# Altium PCB stop_sign.PcbDoc (part 1 of 2)
Units mm, origin at the board's own origin, x right, y up, seen from the top; angles counter-clockwise.
Board outline 187.78 x 187.78 mm, 2 copper layers (Top Layer, Bottom Layer); 123 components, 124 nets, 550 pads, 94 vias.
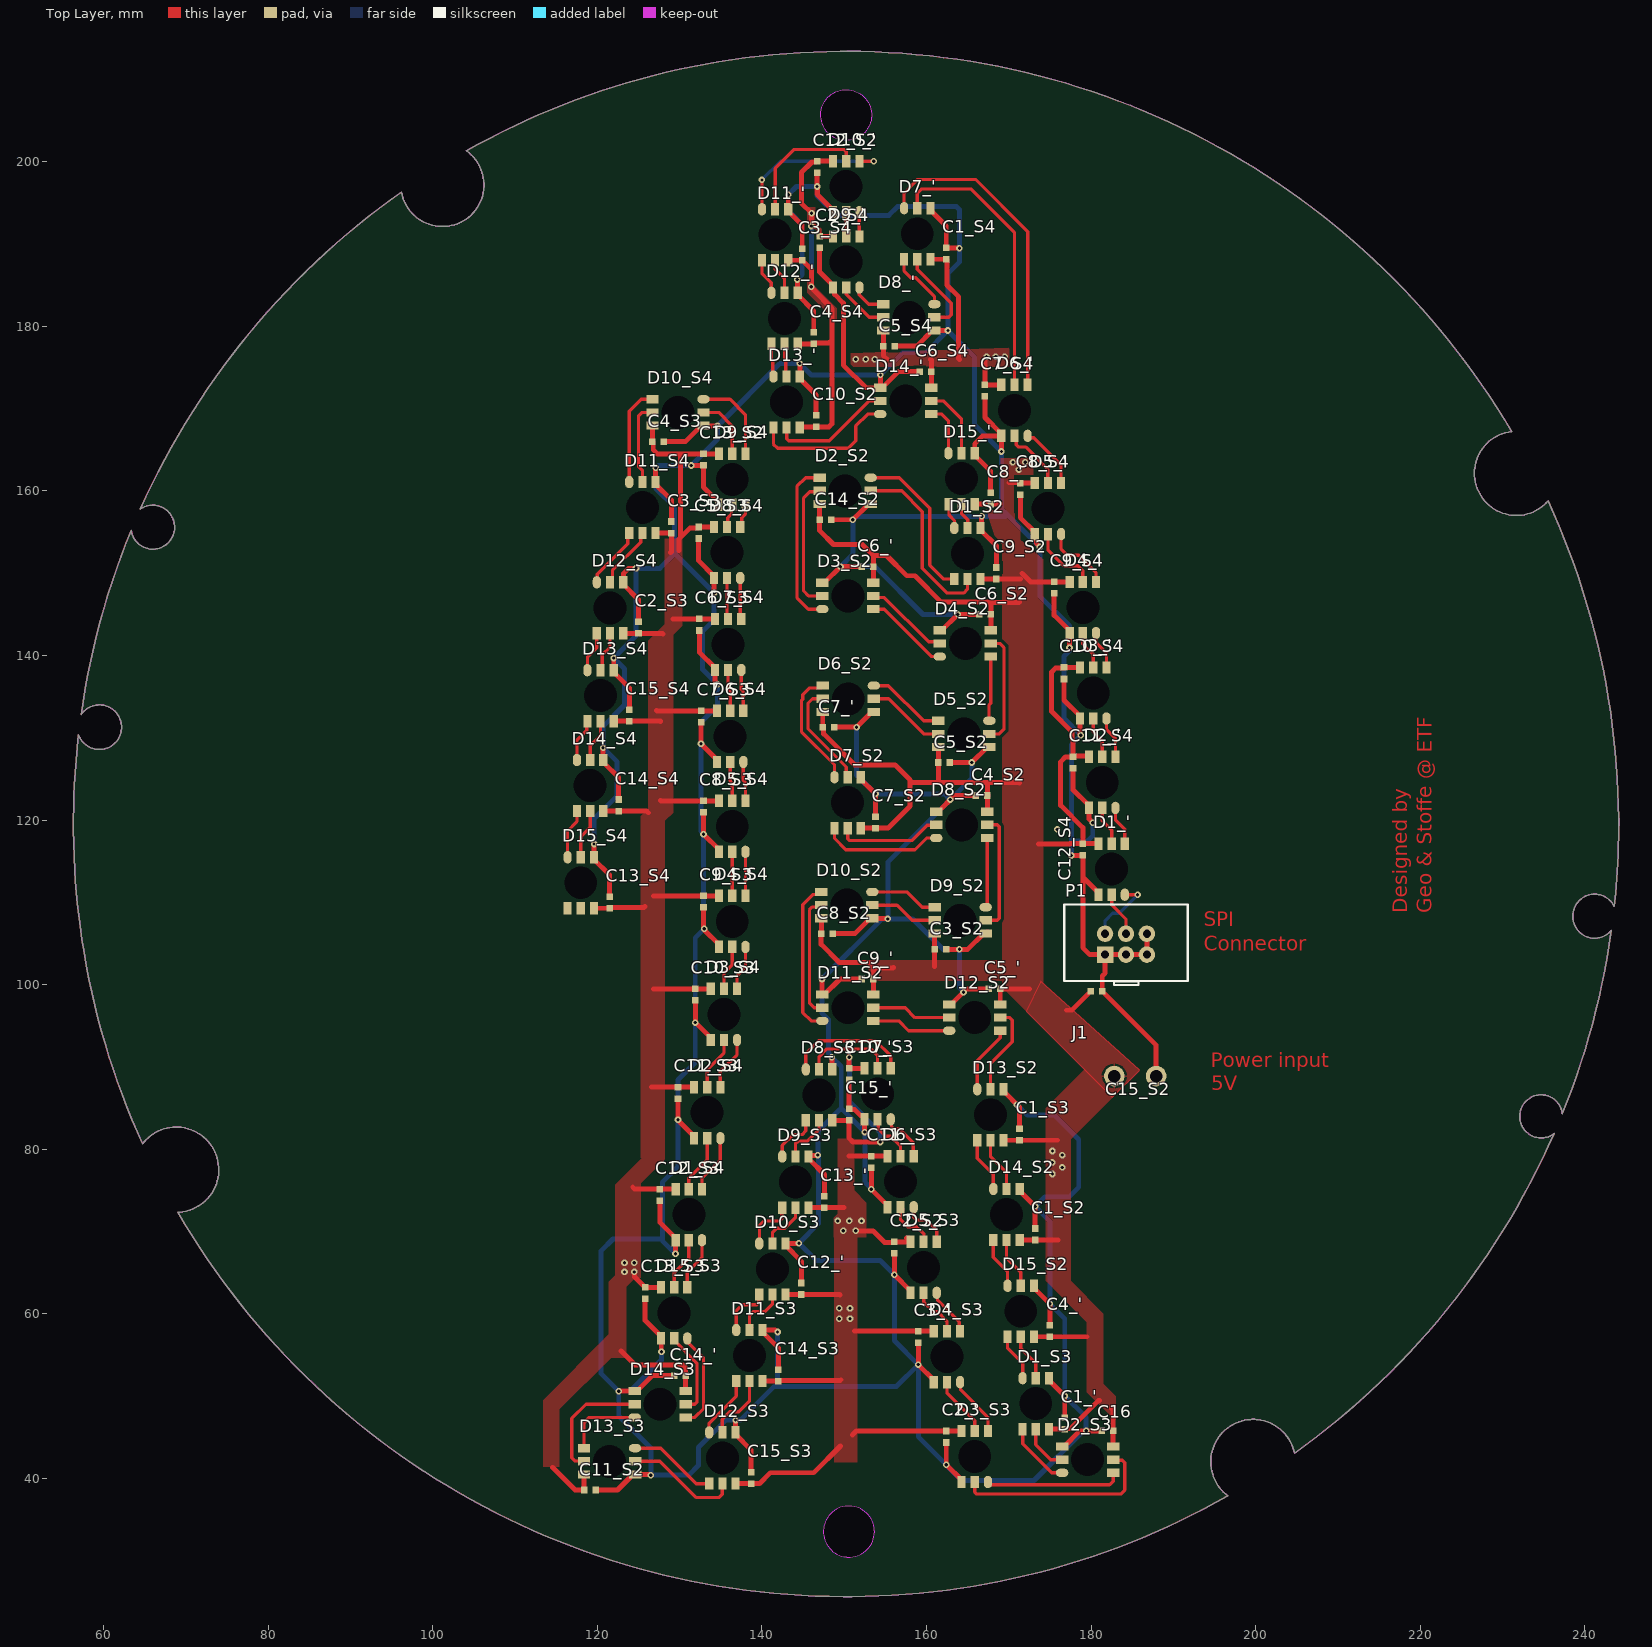
[diagram p0: Top Layer view]
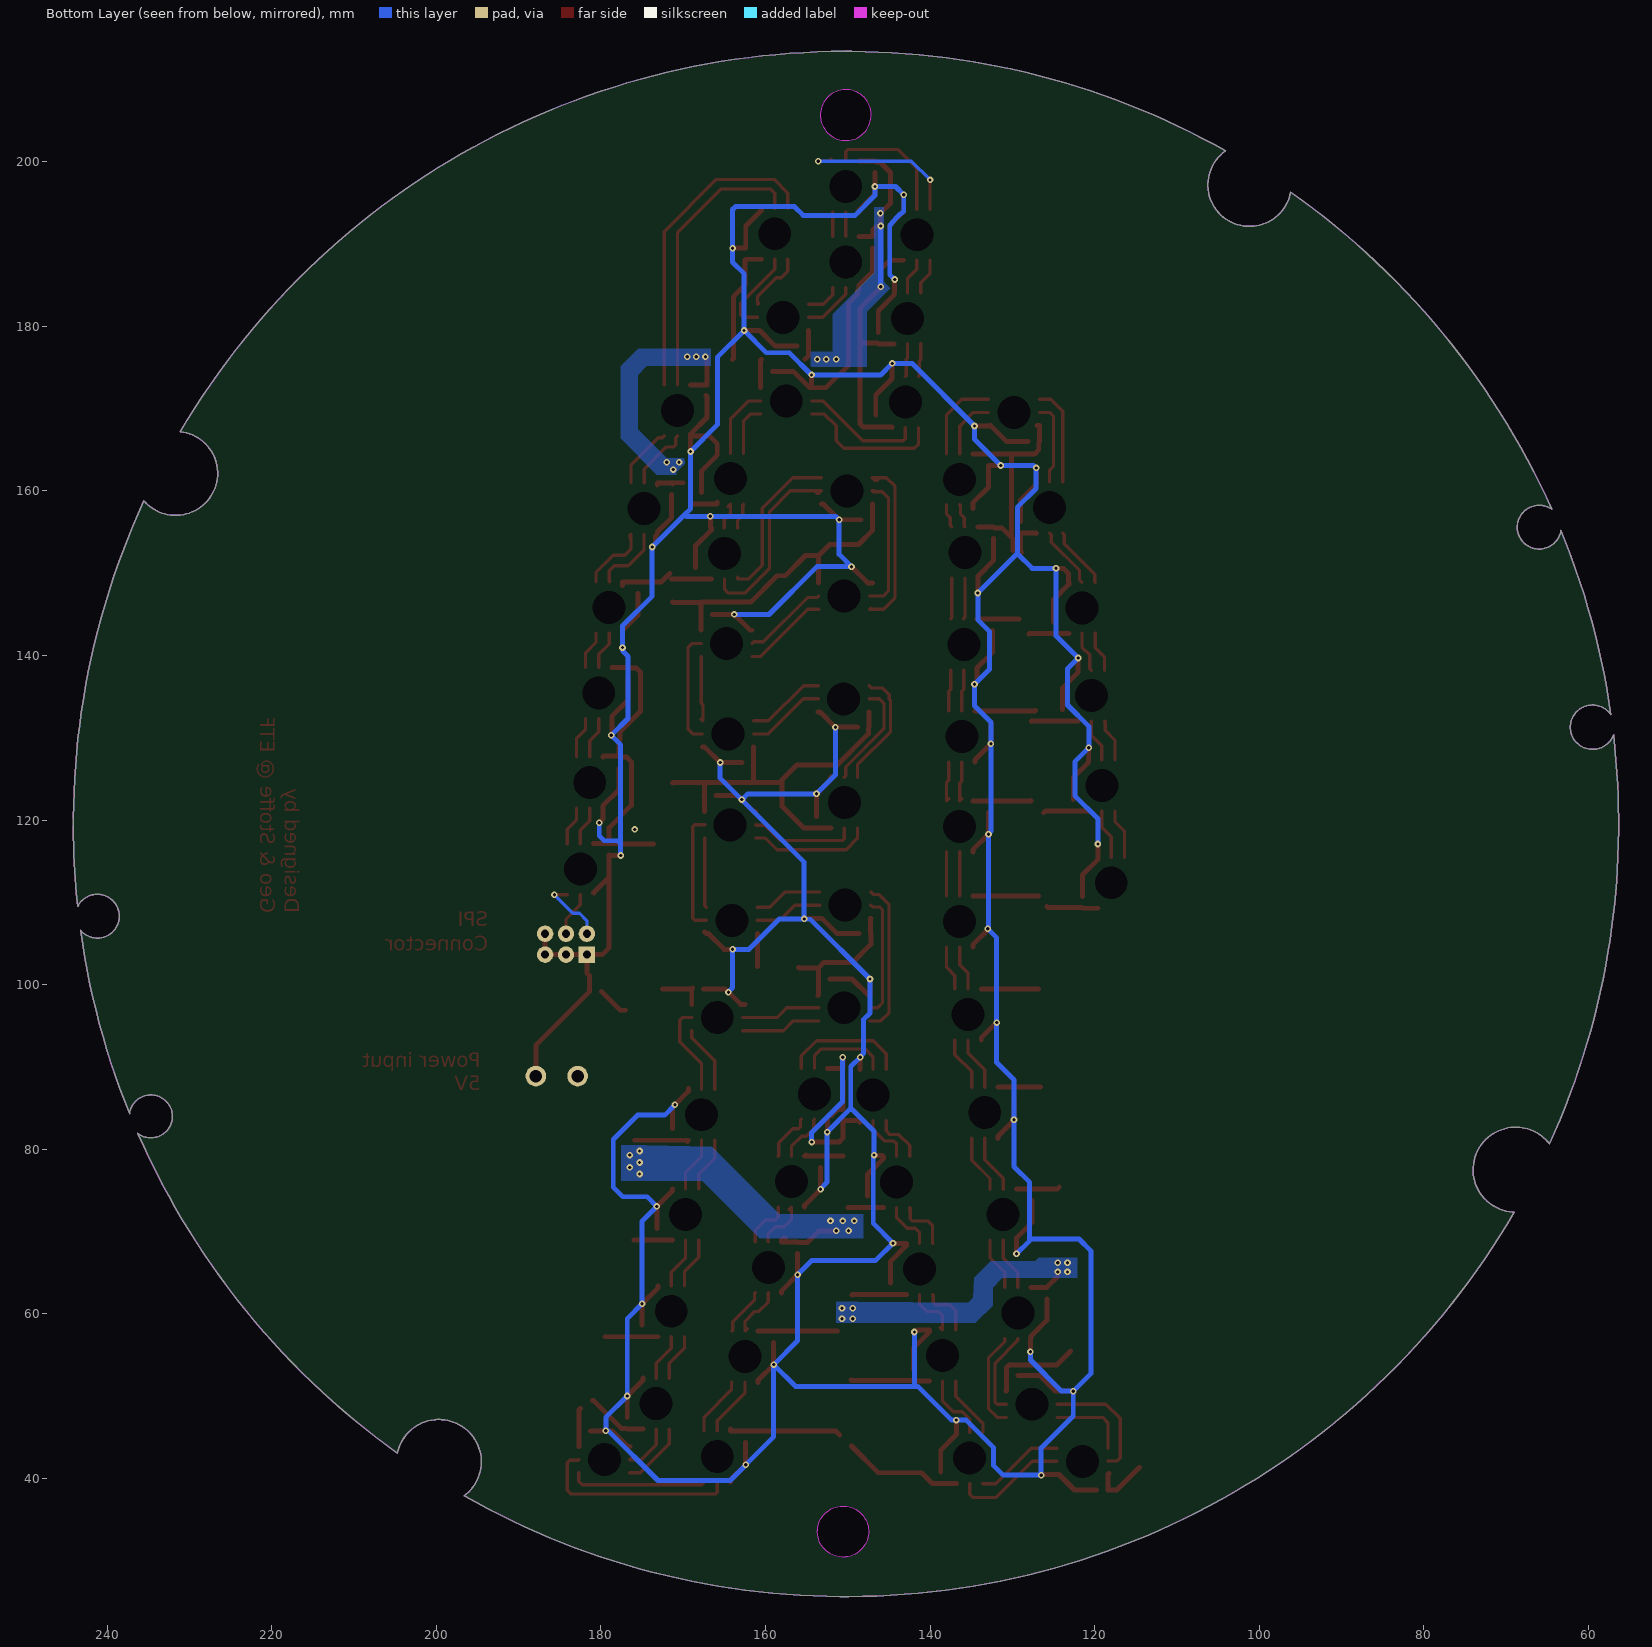
[diagram p1: Bottom Layer view, seen from below]
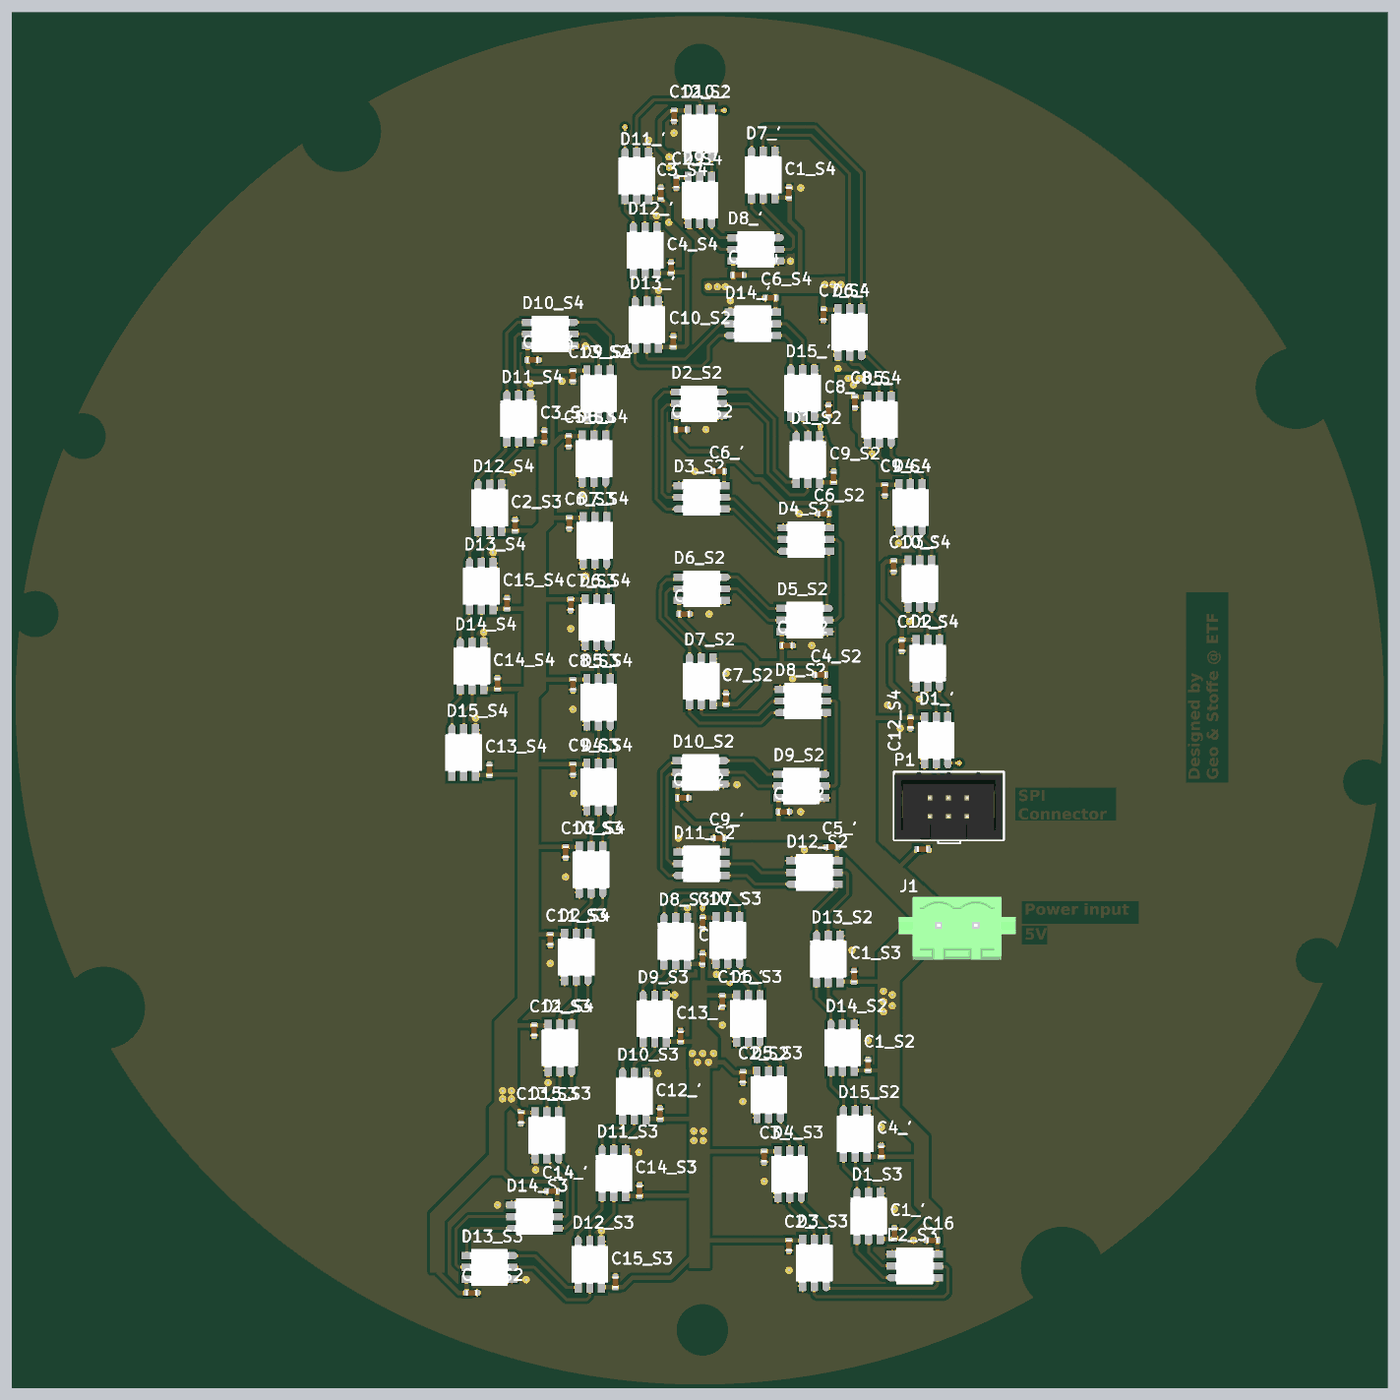
[diagram p3: 3D render of the assembled board from above, using the file's embedded part models]

## Layer stack, top to bottom
Top Solder: solder mask 0.0102, Solder Resist, Dk 3.5
Top Layer: signal copper 0.0356
Dielectric 1: dielectric 0.32, FR-4, Dk 4.8
Bottom Layer: signal copper 0.0356
Bottom Solder: solder mask 0.0102, Solder Resist, Dk 3.5

## Board outline
69.016,72.369 ccw(c68.836,77.602) 69.24,72.382 ccw(c68.841,77.531) 73.127,74.649 ccw(c68.871,77.519) 73.826,76.181 ccw(c68.869,77.517) 73.972,76.953 ccw(c68.811,77.524) 73.999,77.3 ccw(c68.761,77.527) 74.004,77.567 ccw(c68.757,77.527) 73.995,77.831 ccw(c68.836,77.527) 69.43,82.661 ccw(c68.841,77.497) 69.07,82.689 ccw(c68.838,77.448) 68.797,82.694 ccw(c68.837,77.478) 68.668,82.692 ccw(c68.836,77.491) 68.378,82.674 ccw(c68.826,77.579) 66.728,82.244 ccw(c68.841,77.547) 65.999,81.842 ccw(c68.88,77.492) 64.732,80.657 cw(c149.623,119.328) 57.141,107.119 cw(c150.662,119.48) 56.491,113.939 cw(c151.633,119.539) 56.329,118.807 cw(c150.827,119.536) 56.447,124.316 cw(c151.468,119.501) 56.949,130.383 ccw(c59.503,131.304) 58.022,129.029 ccw(c59.485,131.275) 58.851,128.67 ccw(c59.485,131.279) 59.204,128.609 ccw(c59.488,131.308) 59.377,128.597 ccw(c59.489,131.337) 59.511,128.594 ccw(c59.49,131.342) 59.649,128.599 ccw(c59.49,131.297) 62.174,130.987 ccw(c59.474,131.295) 62.189,131.175 ccw(c59.445,131.296) 62.192,131.317 ccw(c59.445,131.296) 62.187,131.455 ccw(c59.489,131.296) 59.8,133.981 ccw(c59.492,131.283) 59.611,133.996 ccw(c59.49,131.256) 59.469,133.998 59.439,133.998 ccw(c59.49,131.264) 59.294,133.992 ccw(c59.484,131.318) 58.198,133.669 ccw(c59.504,131.284) 57.262,132.822 cw(c149.561,119.762) 63.342,155.203 ccw(c65.981,155.6) 64.49,153.386 ccw(c65.971,155.58) 65.327,153.013 ccw(c65.971,155.583) 65.687,152.949 ccw(c65.975,155.614) 65.86,152.936 ccw(c65.976,155.639) 65.997,152.933 ccw(c65.976,155.641) 66.133,152.938 ccw(c65.976,155.6) 68.625,155.294 ccw(c65.963,155.598) 68.64,155.48 ccw(c65.936,155.599) 68.642,155.62 ccw(c65.934,155.599) 68.638,155.756 ccw(c65.976,155.599) 66.282,158.249 ccw(c65.978,155.587) 66.096,158.263 ccw(c65.977,155.559) 65.956,158.266 ccw(c65.976,155.577) 65.845,158.263 ccw(c65.972,155.618) 64.781,157.983 ccw(c65.985,155.592) 64.45,157.785 cw(c150.48,119.27) 96.195,196.327 ccw(c101.183,197.201) 98.319,193.025 ccw(c101.165,197.165) 99.962,192.287 ccw(c101.165,197.171) 100.627,192.17 ccw(c101.171,197.227) 100.959,192.145 ccw(c101.173,197.28) 101.213,192.141 101.238,192.141 ccw(c101.174,197.28) 101.504,192.152 ccw(c101.174,197.201) 106.201,196.619 ccw(c101.148,197.196) 106.229,196.972 ccw(c101.098,197.198) 106.234,197.238 ccw(c101.117,197.199) 106.23,197.4 ccw(c101.148,197.2) 106.209,197.699 ccw(c101.227,197.21) 105.846,199.141 ccw(c101.203,197.199) 105.443,199.91 ccw(c101.143,197.159) 104.093,201.325 cw(c150.014,120.119) 137.99,212.631 cw(c150.163,119.076) 144.668,213.259 cw(c150.221,118.108) 149.489,213.419 150.321,213.421 cw(c150.235,118.191) 155.38,213.282 cw(c150.236,119.549) 231.105,167.219 ccw(c231.682,162.142) 226.606,162.729 ccw(c231.709,162.148) 226.578,162.372 ccw(c231.763,162.145) 226.573,162.105 ccw(c231.763,162.144) 226.581,161.844 ccw(c231.682,162.145) 231.095,157.069 ccw(c231.678,162.173) 231.451,157.041 ccw(c231.68,162.225) 231.72,157.036 231.734,157.036 ccw(c231.681,162.196) 231.988,157.045 ccw(c231.69,162.093) 233.985,157.587 ccw(c231.666,162.14) 234.601,157.957 ccw(c231.632,162.189) 235.527,158.79 cw(c150.832,119.755) 243.35,131.473 cw(c149.647,119.582) 243.945,125.016 cw(c148.684,119.525) 244.101,120.258 244.103,119.313 cw(c150.672,119.544) 244.065,116.857 cw(c149.755,119.57) 243.981,114.75 cw(c148.83,119.616) 243.866,112.868 cw(c147.828,119.687) 243.728,111.144 243.571,109.534 ccw(c241.176,108.318) 242.593,110.6 ccw(c241.197,108.352) 241.842,110.918 ccw(c241.198,108.35) 241.475,110.983 ccw(c241.194,108.325) 241.303,110.996 ccw(c241.193,108.296) 241.172,110.998 ccw(c241.193,108.291) 241.036,110.993 ccw(c241.193,108.329) 238.542,108.635 ccw(c241.207,108.331) 238.527,108.449 ccw(c241.237,108.33) 238.524,108.309 ccw(c241.24,108.33) 238.529,108.173 ccw(c241.193,108.33) 240.887,105.678 ccw(c241.191,108.344) 241.073,105.664 ccw(c241.192,108.375) 241.213,105.661 241.242,105.662 ccw(c241.193,108.355) 241.383,105.668 ccw(c241.198,108.303) 242.349,105.925 ccw(c241.187,108.325) 242.692,106.124 ccw(c241.169,108.351) 243.214,106.591 cw(c150.867,119.307) 237.272,84.324 ccw(c234.679,84.001) 234.974,86.597 ccw(c234.683,83.988) 234.797,86.611 ccw(c234.681,83.959) 234.661,86.613 ccw(c234.681,83.961) 234.528,86.609 ccw(c234.681,84.001) 232.086,84.301 ccw(c234.696,84.003) 232.072,84.119 ccw(c234.725,84.002) 232.069,83.981 ccw(c234.725,84.002) 232.073,83.848 ccw(c234.682,84.002) 234.381,81.406 ccw(c234.679,84.017) 234.564,81.392 ccw(c234.681,84.045) 234.701,81.389 ccw(c234.681,84.018) 234.807,81.392 ccw(c234.684,83.971) 235.591,81.554 ccw(c234.677,83.99) 235.847,81.666 ccw(c234.665,84.014) 236.054,81.782 ccw(c234.651,84.037) 236.265,81.928 cw(c149.955,119.783) 204.727,43.086 ccw(c199.683,42.024) 200.266,47.145 ccw(c199.689,41.997) 199.914,47.173 ccw(c199.687,41.947) 199.646,47.177 ccw(c199.686,41.944) 199.383,47.169 ccw(c199.686,42.025) 194.568,42.617 ccw(c199.714,42.03) 194.539,42.258 ccw(c199.768,42.027) 194.535,41.986 ccw(c199.753,42.027) 194.536,41.881 ccw(c199.722,42.025) 194.552,41.598 ccw(c199.632,42.015) 195.015,39.857 ccw(c199.668,42.033) 195.408,39.162 ccw(c199.723,42.072) 196.613,37.898 cw(c150.414,118.949) 162.469,26.438 cw(c150.267,119.978) 155.795,25.808 cw(c150.208,120.949) 150.94,25.647 149.894,25.644 cw(c150.193,120.842) 144.806,25.796 cw(c150.196,119.523)
cut-out: 147.472,33.367 ccw(c150.575,33.55) 150.218,30.463 ccw(c150.572,33.569) 150.434,30.445 ccw(c150.574,33.599) 150.598,30.443 ccw(c150.574,33.602) 150.757,30.448 ccw(c150.574,33.55) 153.661,33.193 ccw(c150.555,33.548) 153.678,33.41 ccw(c150.524,33.549) 153.681,33.574 ccw(c150.522,33.549) 153.676,33.732 ccw(c150.573,33.549) 150.93,36.637 ccw(c150.576,33.534) 150.714,36.654 ccw(c150.575,33.504) 150.55,36.657 ccw(c150.574,33.5) 150.391,36.652 ccw(c150.574,33.549) 147.487,33.906 ccw(c150.592,33.552) 147.47,33.689 ccw(c150.623,33.55) 147.467,33.526 ccw(c150.626,33.55)
cut-out: 149.886,202.612 cw(c150.241,205.683) 147.154,205.501 cw(c150.292,205.683) 147.149,205.659 cw(c150.287,205.684) 147.152,205.822 cw(c150.259,205.685) 147.169,206.037 cw(c150.241,205.682) 150.059,208.769 cw(c150.24,205.636) 150.216,208.774 cw(c150.241,205.64) 150.379,208.771 cw(c150.242,205.664) 150.595,208.754 cw(c150.24,205.683) 153.326,205.865 cw(c150.189,205.683) 153.331,205.707 cw(c150.197,205.682) 153.329,205.544 cw(c150.224,205.681) 153.311,205.328 cw(c150.24,205.684) 150.422,202.597 cw(c150.24,205.735) 150.264,202.592 cw(c150.24,205.732) 150.101,202.595 cw(c150.238,205.701)

## Design rules (kind name [scope] priority, off if disabled: settings)
Clearance [All] p1: gap=0.4 ignorepadtopadclearanceinfootprint=FALSE except(0.2: THPad-Hole; 0.3: SMDPad-THPad SMDPad-Hole)
HoleSize [All] p1: absolutevalues=TRUE maxlimit=5 minlimit=0.025 maxpercent=80.000 minpercent=20.000
MinimumSolderMaskSliver [All] p1 off: minsoldermaskwidth=0.254
PlaneConnect [All] p1: planeconnectstyle=Relief reliefexpansion=0.508 reliefentries=4 reliefconductorwidth=0.4 reliefairgap=0.4
PolygonConnect PolygonConnect_1 [IsVia] p1: connectstyle=Direct reliefconductorwidth=0.254 reliefentries=4 polygonreliefangle="90 Angle" airgapwidth=0.254
PolygonConnect [All] p2: connectstyle=Relief reliefconductorwidth=0.254 reliefentries=4 polygonreliefangle="90 Angle" airgapwidth=0.254
RoutingVias [All] p1: holewidth=0.4 width=0.8 viastyle="Through Hole" minholewidth=0.4 minwidth=0.8 maxholewidth=0.4 maxwidth=0.8
SilkToSilkClearance [All] p1 off: silktosilkclearance=0.254
SilkToSolderMaskClearance [IsPad] p1 off: minsilkscreentomaskgap=0.254 clearancetoexposedcopper=TRUE
SolderMaskExpansion [All] p1: expansion=0.102 istentingtop=FALSE
Width Width_1 [InNet('5V') OR InNet('GND')] p1: maxlimit=0.6 minlimit=0.6 preferedwidth=0.6
Width [All] p2: maxlimit=0.8 minlimit=0.3 preferedwidth=0.4
25 further rules are at their usual default settings.

## Classes and differential pairs
channel class sk9822_array: ' S2 S3 S4
component class stop_sign: C16 J1 P1
component class S4: C1_S4 C2_S4 C3_S4 C4_S4 C5_S4 C6_S4 C7_S4 C8_S4 C9_S4 C10_S4 C11_S4 C12_S4 C13_S4 C14_S4 C15_S4 D1_S4 D2_S4 D3_S4 D4_S4 D5_S4 D6_S4 D7_S4 D8_S4 D9_S4 D10_S4 D11_S4 D12_S4 D13_S4 D14_S4 D15_S4
component class S3: C1_S3 C2_S3 C3_S3 C4_S3 C5_S3 C6_S3 C7_S3 C8_S3 C9_S3 C10_S3 C11_S3 C12_S3 C13_S3 C14_S3 C15_S3 D1_S3 D2_S3 D3_S3 D4_S3 D5_S3 D6_S3 D7_S3 D8_S3 D9_S3 D10_S3 D11_S3 D12_S3 D13_S3 D14_S3 D15_S3
component class S2: C1_S2 C2_S2 C3_S2 C4_S2 C5_S2 C6_S2 C7_S2 C8_S2 C9_S2 C10_S2 C11_S2 C12_S2 C13_S2 C14_S2 C15_S2 D1_S2 D2_S2 D3_S2 D4_S2 D5_S2 D6_S2 D7_S2 D8_S2 D9_S2 D10_S2 D11_S2 D12_S2 D13_S2 D14_S2 D15_S2
component class ': C1_' C2_' C3_' C4_' C5_' C6_' C7_' C8_' C9_' C10_' C11_' C12_' C13_' C14_' C15_' D1_' D2_' D3_' D4_' D5_' D6_' D7_' D8_' D9_' D10_' D11_' D12_' D13_' D14_' D15_'

## Components (designator, comment, footprint, x,y, rotation, side; value= is the part's Value field where it differs from the comment)
C1_' "0603, capacitor" "0603 cap" 176.8,46.697 r90 top value=100n (schematic designator C1)
C1_S2 "0603, capacitor" "0603 cap" 173.2,69.684 r90 top value=100n (schematic designator C1)
C1_S3 "0603, capacitor" "0603 cap" 171.3,81.801 r90 top value=100n (schematic designator C1)
C1_S4 "0603, capacitor" "0603 cap" 162.4,188.862 r90 top value=100n (schematic designator C1)
C2_' "0603, capacitor" "0603 cap" 162.4,45.072 r270 top value=100n (schematic designator C2)
C2_S2 "0603, capacitor" "0603 cap" 156.1,68.059 r270 top value=100n (schematic designator C2)
C2_S3 "0603, capacitor" "0603 cap" 125,143.396 r90 top value=100n (schematic designator C2)
C2_S4 "0603, capacitor" "0603 cap" 147,190.233 r270 top value=100n (schematic designator C2)
C3_' "0603, capacitor" "0603 cap" 159,57.212 r270 top value=100n (schematic designator C3)
C3_S2 "0603, capacitor" "0603 cap" 161.684,104.3 r0 top value=100n (schematic designator C3)
C3_S3 "0603, capacitor" "0603 cap" 129,155.588 r90 top value=100n (schematic designator C3)
C3_S4 "0603, capacitor" "0603 cap" 144.9,188.735 r90 top value=100n (schematic designator C3)
C4_' "0603, capacitor" "0603 cap" 175,57.925 r90 top value=100n (schematic designator C4)
C4_S2 "0603, capacitor" "0603 cap" 166.686,123 r180 top value=100n (schematic designator C4)
C4_S3 "0603, capacitor" "0603 cap" 127.394,166 r0 top value=100n (schematic designator C4)
C4_S4 "0603, capacitor" "0603 cap" 146.3,178.575 r90 top value=100n (schematic designator C4)
C5_' "0603, capacitor" "0603 cap" 168.262,99.5 r180 top value=100n (schematic designator C5)
C5_S2 "0603, capacitor" "0603 cap" 162.14,127 r0 top value=100n (schematic designator C5)
C5_S3 "0603, capacitor" "0603 cap" 132.3,154.927 r270 top value=100n (schematic designator C5)
C5_S4 "0603, capacitor" "0603 cap" 155.461,177.6 r0 top value=100n (schematic designator C5)
C6_' "0603, capacitor" "0603 cap" 152.843,150.8 r180 top value=100n (schematic designator C6)
C6_S2 "0603, capacitor" "0603 cap" 167.119,145 r180 top value=100n (schematic designator C6)
C6_S3 "0603, capacitor" "0603 cap" 132.4,143.751 r270 top value=100n (schematic designator C6)
C6_S4 "0603, capacitor" "0603 cap" 159.88,174.5 r180 top value=100n (schematic designator C6)
C7_' "0603, capacitor" "0603 cap" 148.095,131.3 r0 top value=100n (schematic designator C7)
C7_S2 "0603, capacitor" "0603 cap" 153.8,119.722 r90 top value=100n (schematic designator C7)
C7_S3 "0603, capacitor" "0603 cap" 132.6,132.575 r270 top value=100n (schematic designator C7)
C7_S4 "0603, capacitor" "0603 cap" 167.1,172.2 r270 top value=100n (schematic designator C7)
C8_' "0603, capacitor" "0603 cap" 167.8,159.092 r90 top value=100n (schematic designator C8)
C8_S2 "0603, capacitor" "0603 cap" 147.916,106.2 r0 top value=100n (schematic designator C8)
C8_S3 "0603, capacitor" "0603 cap" 132.9,121.653 r270 top value=100n (schematic designator C8)
C8_S4 "0603, capacitor" "0603 cap" 171.4,160.261 r270 top value=100n (schematic designator C8)
C9_' "0603, capacitor" "0603 cap" 152.843,100.7 r180 top value=100n (schematic designator C9)
C9_S2 "0603, capacitor" "0603 cap" 168.5,150 r90 top value=100n (schematic designator C9)
C9_S3 "0603, capacitor" "0603 cap" 132.9,110.096 r270 top value=100n (schematic designator C9)
C9_S4 "0603, capacitor" "0603 cap" 175.5,148.248 r270 top value=100n (schematic designator C9)
C10_' "0603, capacitor" "0603 cap" 150.6,89.141 r270 top value=100n (schematic designator C10)
C10_S2 "0603, capacitor" "0603 cap" 146.6,168.5 r90 top value=100n (schematic designator C10)
C10_S3 "0603, capacitor" "0603 cap" 131.9,98.793 r270 top value=100n (schematic designator C10)
C10_S4 "0603, capacitor" "0603 cap" 176.7,137.857 r270 top value=100n (schematic designator C10)
C11_' "0603, capacitor" "0603 cap" 153.3,78.473 r270 top value=100n (schematic designator C11)
C11_S2 "0603, capacitor" "0603 cap" 119.087,38.6 r0 top value=100n (schematic designator C11)
C11_S3 "0603, capacitor" "0603 cap" 129.8,86.855 r270 top value=100n (schematic designator C11)
C11_S4 "0603, capacitor" "0603 cap" 177.8,126.987 r270 top value=100n (schematic designator C11)
C12_' "0603, capacitor" "0603 cap" 144.8,63.057 r90 top value=100n (schematic designator C12)
C12_S2 "0603, capacitor" "0603 cap" 146.7,199.377 r270 top value=100n (schematic designator C12)
C12_S3 "0603, capacitor" "0603 cap" 127.6,74.461 r270 top value=100n (schematic designator C12)
C12_S4 "0603, capacitor" "0603 cap" 179,116.446 r270 top value=100n (schematic designator C12)
C13_' "0603, capacitor" "0603 cap" 147.6,73.621 r90 top value=100n (schematic designator C13)
C13_S2 "0603, capacitor" "0603 cap" 132.9,163.817 r270 top value=100n (schematic designator C13)
C13_S3 "0603, capacitor" "0603 cap" 125.798,62.523 r270 top value=100n (schematic designator C13)
C13_S4 "0603, capacitor" "0603 cap" 121.5,109.995 r90 top value=100n (schematic designator C13)
C14_' "0603, capacitor" "0603 cap" 130.035,52.5 r180 top value=100n (schematic designator C14)
C14_S2 "0603, capacitor" "0603 cap" 147.714,156.5 r0 top value=100n (schematic designator C14)
C14_S3 "0603, capacitor" "0603 cap" 142,52.539 r90 top value=100n (schematic designator C14)
C14_S4 "0603, capacitor" "0603 cap" 122.6,121.806 r90 top value=100n (schematic designator C14)
C15_' "0603, capacitor" "0603 cap" 150.6,84.214 r90 top value=100n (schematic designator C15)
C15_S2 "0603, capacitor" "0603 cap" 180.659,99.2 r0 top value=100n (schematic designator C15)
C15_S3 "0603, capacitor" "0603 cap" 138.7,40.07 r90 top value=100n (schematic designator C15)
C15_S4 "0603, capacitor" "0603 cap" 123.9,132.728 r90 top value=100n (schematic designator C15)
C16 "0603, capacitor" "0603 cap" 181.978,45.8 r180 top value=100n
D1_' "Neo - SK9822" SK9822_FLIPPED 182.499,114.046 r270 top value=WS2812 (schematic designator D1)
D1_S2 "Neo - SK9822" SK9822_FLIPPED 164.973,152.4 r90 top value=WS2812 (schematic designator D1)
D1_S3 "Neo - SK9822" SK9822_FLIPPED 173.279,49.097 r90 top value=WS2812 (schematic designator D1)
D1_S4 "Neo - SK9822" SK9822_FLIPPED 131.115,72.061 r270 top value=WS2812 (schematic designator D1)
D2_' "Neo - SK9822" SK9822_FLIPPED 181.356,124.587 r270 top value=WS2812 (schematic designator D2)
D2_S2 "Neo - SK9822" SK9822_FLIPPED 150.114,160.02 r0 top value=WS2812 (schematic designator D2)
D2_S3 "Neo - SK9822" SK9822_FLIPPED 179.578,42.291 r180 top value=WS2812 (schematic designator D2)
D2_S4 "Neo - SK9822" SK9822_FLIPPED 133.35,84.455 r270 top value=WS2812 (schematic designator D2)
D3_' "Neo - SK9822" SK9822_FLIPPED 180.264,135.457 r270 top value=WS2812 (schematic designator D3)
D3_S2 "Neo - SK9822" SK9822_FLIPPED 150.443,147.244 r180 top value=WS2812 (schematic designator D3)
D3_S3 "Neo - SK9822" SK9822_FLIPPED 165.862,42.672 r270 top value=WS2812 (schematic designator D3)
D3_S4 "Neo - SK9822" SK9822_FLIPPED 135.382,96.393 r270 top value=WS2812 (schematic designator D3)
D4_' "Neo - SK9822" SK9822_FLIPPED 178.994,145.848 r270 top value=WS2812 (schematic designator D4)
D4_S2 "Neo - SK9822" SK9822_FLIPPED 164.719,141.478 r180 top value=WS2812 (schematic designator D4)
D4_S3 "Neo - SK9822" SK9822_FLIPPED 162.484,54.812 r270 top value=WS2812 (schematic designator D4)
D4_S4 "Neo - SK9822" SK9822_FLIPPED 136.398,107.696 r270 top value=WS2812 (schematic designator D4)
D5_' "Neo - SK9822" SK9822_FLIPPED 174.752,157.861 r270 top value=WS2812 (schematic designator D5)
D5_S2 "Neo - SK9822" SK9822_FLIPPED 164.54,130.48 r0 top value=WS2812 (schematic designator D5)
D5_S3 "Neo - SK9822" SK9822_FLIPPED 159.639,65.659 r270 top value=WS2812 (schematic designator D5)
D5_S4 "Neo - SK9822" SK9822_FLIPPED 136.398,119.253 r270 top value=WS2812 (schematic designator D5)
D6_' "Neo - SK9822" SK9822_FLIPPED 170.688,169.799 r270 top value=WS2812 (schematic designator D6)
D6_S2 "Neo - SK9822" SK9822_FLIPPED 150.495,134.747 r0 top value=WS2812 (schematic designator D6)
D6_S3 "Neo - SK9822" SK9822_FLIPPED 156.845,76.073 r270 top value=WS2812 (schematic designator D6)
D6_S4 "Neo - SK9822" SK9822_FLIPPED 136.144,130.175 r270 top value=WS2812 (schematic designator D6)
D7_' "Neo - SK9822" SK9822_FLIPPED 158.877,191.262 r90 top value=WS2812 (schematic designator D7)
D7_S2 "Neo - SK9822" SK9822_FLIPPED 150.419,122.122 r90 top value=WS2812 (schematic designator D7)
D7_S3 "Neo - SK9822" SK9822_FLIPPED 154.051,86.741 r270 top value=WS2812 (schematic designator D7)
D7_S4 "Neo - SK9822" SK9822_FLIPPED 135.89,141.351 r270 top value=WS2812 (schematic designator D7)
D8_' "Neo - SK9822" SK9822_FLIPPED 157.861,181.102 r0 top value=WS2812 (schematic designator D8)
D8_S2 "Neo - SK9822" SK9822_FLIPPED 164.286,119.431 r180 top value=WS2812 (schematic designator D8)
D8_S3 "Neo - SK9822" SK9822_FLIPPED 146.939,86.614 r90 top value=WS2812 (schematic designator D8)
D8_S4 "Neo - SK9822" SK9822_FLIPPED 135.763,152.527 r270 top value=WS2812 (schematic designator D8)
D9_' "Neo - SK9822" SK9822_FLIPPED 150.241,187.833 r270 top value=WS2812 (schematic designator D9)
D9_S2 "Neo - SK9822" SK9822_FLIPPED 164.084,107.823 r0 top value=WS2812 (schematic designator D9)
D9_S3 "Neo - SK9822" SK9822_FLIPPED 144.069,76.021 r90 top value=WS2812 (schematic designator D9)
D9_S4 "Neo - SK9822" SK9822_FLIPPED 136.398,161.417 r270 top value=WS2812 (schematic designator D9)
D10_' "Neo - SK9822" SK9822_FLIPPED 150.241,196.977 r270 top value=WS2812 (schematic designator D10)
D10_S2 "Neo - SK9822" SK9822_FLIPPED 150.316,109.677 r0 top value=WS2812 (schematic designator D10)
D10_S3 "Neo - SK9822" SK9822_FLIPPED 141.275,65.457 r90 top value=WS2812 (schematic designator D10)
D10_S4 "Neo - SK9822" SK9822_FLIPPED 129.794,169.545 r0 top value=WS2812 (schematic designator D10)
D11_' "Neo - SK9822" SK9822_FLIPPED 141.605,191.135 r90 top value=WS2812 (schematic designator D11)
D11_S2 "Neo - SK9822" SK9822_FLIPPED 150.443,97.206 r180 top value=WS2812 (schematic designator D11)
D11_S3 "Neo - SK9822" SK9822_FLIPPED 138.481,54.939 r90 top value=WS2812 (schematic designator D11)
D11_S4 "Neo - SK9822" SK9822_FLIPPED 125.476,157.988 r90 top value=WS2812 (schematic designator D11)
D12_' "Neo - SK9822" SK9822_FLIPPED 142.748,180.975 r90 top value=WS2812 (schematic designator D12)
D12_S2 "Neo - SK9822" SK9822_FLIPPED 165.862,96.012 r180 top value=WS2812 (schematic designator D12)
D12_S3 "Neo - SK9822" SK9822_FLIPPED 135.2,42.5 r90 top value=WS2812 (schematic designator D12)
D12_S4 "Neo - SK9822" SK9822_FLIPPED 121.539,145.796 r90 top value=WS2812 (schematic designator D12)
D13_' "Neo - SK9822" SK9822_FLIPPED 143.002,170.815 r90 top value=WS2812 (schematic designator D13)
D13_S2 "Neo - SK9822" SK9822_FLIPPED 167.767,84.201 r90 top value=WS2812 (schematic designator D13)
D13_S3 "Neo - SK9822" SK9822_FLIPPED 121.487,42.088 r0 top value=WS2812 (schematic designator D13)
D13_S4 "Neo - SK9822" SK9822_FLIPPED 120.396,135.128 r90 top value=WS2812 (schematic designator D13)
D14_' "Neo - SK9822" SK9822_FLIPPED 157.48,170.942 r180 top value=WS2812 (schematic designator D14)
D14_S2 "Neo - SK9822" SK9822_FLIPPED 169.723,72.084 r90 top value=WS2812 (schematic designator D14)
D14_S3 "Neo - SK9822" SK9822_FLIPPED 127.635,49.022 r180 top value=WS2812 (schematic designator D14)
D14_S4 "Neo - SK9822" SK9822_FLIPPED 119.126,124.206 r90 top value=WS2812 (schematic designator D14)
D15_' "Neo - SK9822" SK9822_FLIPPED 164.262,161.492 r90 top value=WS2812 (schematic designator D15)
D15_S2 "Neo - SK9822" SK9822_FLIPPED 171.45,60.325 r90 top value=WS2812 (schematic designator D15)
D15_S3 "Neo - SK9822" SK9822_FLIPPED 129.337,60.123 r270 top value=WS2812 (schematic designator D15)
D15_S4 "Neo - SK9822" SK9822_FLIPPED 117.983,112.395 r90 top value=WS2812 (schematic designator D15)
J1 "2 Pole MSTBA Connector" 2POLE_MSTBA 187.9,88.9 r180 top
P1 "2x3 Pin Header" "2x3 PH" 184.24,104.93 r0 top value="2x3 Pin Header, 2.54mm"

## Footprints (in the part's own frame and the unit in brackets; to place one, negate y for a bottom-side part, rotate by r counter-clockwise, add the part's x,y. Pads: shape width x height; smd on the part's side, far side on the other; paste and mask are expansions set on the pad)
2POLE_MSTBA [mm]
  round 2.5 hole 1.5 mask+0: 1(0,0) 2(5.08,0)
  body extent -5.46,-3.77 10.52,4.83, height 12
"2x3 PH" [mm] "2x3 Pin Header, 2.54 pitch"
  rect 2x2 hole 1: 1(-2.54,-1.27)
  round 2 hole 1: 2(0,-1.27) 3(2.54,-1.27) 4(2.54,1.27) 5(0,1.27) 6(-2.54,1.27)
  silkscreen extent -7.5,-4.94 7.5,4.84, body extent -7.48,-4.44 7.35,4.83, height 9.89
"0603 cap" [mm]
  rect 0.8x0.8 smd: 0(0.7,0.002) 1(-0.7,0.002)
  body extent -0.83,-0.4 0.77,0.4, height 0.6
SK9822_FLIPPED [mm]
  oval 1.5x1 smd: 1(3.1,1.6)
  rect 1.5x1 smd: 2(3.1,0) 3(3.1,-1.6) 4(-3.1,-1.6) 5(-3.1,0) 6(-3.1,1.6)
  round 1 hole 4: nc(0,0)
  body extent -2.7,-2.5 2.7,2.5, height 1.9

## Part data
P1: library part "2x3 Ribbon connector", "2x3 Ribbon connector"
D1_' D1_S2 D1_S3 D1_S4 D2_' D2_S2 D2_S3 D2_S4 D3_' D3_S2 D3_S3 D3_S4 D4_' D4_S2 D4_S3 D4_S4 D5_' D5_S2 D5_S3 D5_S4 D6_' D6_S2 D6_S3 D6_S4 D7_' D7_S2 D7_S3 D7_S4 D8_' D8_S2 D8_S3 D8_S4 D9_' D9_S2 D9_S3 D9_S4 D10_' D10_S2 D10_S3 D10_S4 D11_' D11_S2 D11_S3 D11_S4 D12_' D12_S2 D12_S3 D12_S4 D13_' D13_S2 D13_S3 D13_S4 D14_' D14_S2 D14_S3 D14_S4 D15_' D15_S2 D15_S3 D15_S4: Digikey=1568-1800-ND

## Via types
v1: diameter 0.8, hole 0.4, Top Layer to Bottom Layer, 94 vias

## Nets (pads, with @x,y where several pads share a name; then routed paths per layer and width w, separated by ;. In a path a pad name is that pad's centre, name@x,y a point inside that pad or via, vN(x,y) a via of type N, cw(c..) or ccw(c..) an arc to the next point about the centre after c; other vN are vias at no path point)
5V: C1_'.1 C1_S2.1 C1_S3.1 C1_S4.1 C2_'.1 C2_S2.1 C2_S3.1 C2_S4.1 C3_'.1 C3_S2.1 C3_S3.1 C3_S4.1 C4_'.1 C4_S2.1 C4_S3.1 C4_S4.1 C5_'.1 C5_S2.1 C5_S3.1 C5_S4.1 C6_'.1 C6_S2.1 C6_S3.1 C6_S4.1 C7_'.1 C7_S2.1 C7_S3.1 C7_S4.1 C8_'.1 C8_S2.1 C8_S3.1 C8_S4.1 C9_'.1 C9_S2.1 C9_S3.1 C9_S4.1 C10_'.1 C10_S2.1 C10_S3.1 C10_S4.1 C11_'.1 C11_S2.1 C11_S3.1 C11_S4.1 C12_'.1 C12_S2.1 C12_S3.1 C12_S4.1 C13_'.1 C13_S2.1 C13_S3.1 C13_S4.1 C14_'.1 C14_S2.1 C14_S3.1 C14_S4.1 C15_'.1 C15_S2.1 C15_S3.1 C15_S4.1 C16.1 D1_'.4 D1_S2.4 D1_S3.4 D1_S4.4 D2_'.4 D2_S2.4 D2_S3.4 D2_S4.4 D3_'.4 D3_S2.4 D3_S3.4 D3_S4.4 D4_'.4 D4_S2.4 D4_S3.4 D4_S4.4 D5_'.4 D5_S2.4 D5_S3.4 D5_S4.4 D6_'.4 D6_S2.4 D6_S3.4 D6_S4.4 D7_'.4 D7_S2.4 D7_S3.4 D7_S4.4 D8_'.4 D8_S2.4 D8_S3.4 D8_S4.4 D9_'.4 D9_S2.4 D9_S3.4 D9_S4.4 D10_'.4 D10_S2.4 D10_S3.4 D10_S4.4 D11_'.4 D11_S2.4 D11_S3.4 D11_S4.4 D12_'.4 D12_S2.4 D12_S3.4 D12_S4.4 D13_'.4 D13_S2.4 D13_S3.4 D13_S4.4 D14_'.4 D14_S2.4 D14_S3.4 D14_S4.4 D15_'.4 D15_S2.4 D15_S3.4 D15_S4.4 J1.2 | length 500.1
  Top Layer w0.6: 114.562,41.338 117.297,38.602 C11_S2.1@118.387,38.602 D13_S3.4@118.387,40.488 D13_S3.4@118.275,40.6 ; D15_S4.4@119.583,109.295 C13_S4.1@121.498,109.295 121.598,109.395 125.695,109.395 125.8,109.5 ; D14_S4.4@120.726,121.106 C14_S4.1@122.598,121.106 125.994,121.106 126.2,120.9 ; D13_S4.4@122,132.024 D13_S4.4@121.996,132.028 C15_S4.1@123.898,132.028 127.672,132.028 127.7,132 ; 122.9,55.5 124.6,53.8 130.384,53.8 130.735,53.449 C14_'.1@130.735,52.497 D14_S3.4@130.735,50.622 D14_S3.4@130.759,50.622 ; D12_S4.4@123.139,142.696 C2_S3.1@124.997,142.696 C2_S3.1@124.997,142.696 127.903,142.697 128,142.6 ; 124.3,75.4 124.539,75.161 C12_S3.1@127.602,75.161 D1_S4.4@129.515,75.161 ; v1(124.5,65.1) 124.538,65.062 124.538,64.485 C13_S3.1@125.8,63.223 D15_S3.4@127.737,63.223 ; 126.6,87.6 126.645,87.555 C11_S3.1@129.802,87.555 D2_S4.4@131.75,87.555 ; 126.8,99.5 126.807,99.493 C10_S3.1@131.902,99.493 D3_S4.4@133.782,99.493 ; 126.8,110.8 126.804,110.796 C9_S3.1@132.903,110.796 D4_S4.4@134.798,110.796 ; D10_S4.4@127,167.945 D10_S4.4@126.694,167.945 C4_S3.1@126.694,166.002 126.794,165.902 126.794,165.006 127.3,164.5 130.098,164.5 ; D11_S4.4@127.1,154.84 127.076,154.864 127.1,154.888 C3_S3.1@128.998,154.888 128.998,152.598 128.9,152.5 ; 127.2,133.3 127.225,133.275 C7_S3.1@132.602,133.275 D6_S4.4@134.544,133.275 ; 127.7,122.4 127.747,122.353 C8_S3.1@132.902,122.353 D5_S4.4@134.798,122.353 ; 129.21,144.451 D7_S4.4@134.29,144.451 ; 129.9,152.792 129.9,154.15 131.277,155.527 132.202,155.527 C5_S3.1@132.302,155.627 D8_S4.4@134.163,155.627 D8_S4.4@134.163,155.627 ; 130.098,154.348 130.098,164.5 ; D9_S4.4@134.798,164.517 C13_S2.1@132.902,164.517 132.885,164.5 130.098,164.5 ; D12_S3.4@136.8,39.4 136.8,39.37 C15_S3.1@138.698,39.37 138.725,39.398 139.73,39.398 141.032,40.7 146.3,40.7 149.551,43.951 ; D11_S3.4@140.081,51.839 C14_S3.1@141.998,51.839 142.056,51.898 149.498,51.898 149.6,52 ; D10_S3.4@142.875,62.357 C12_'.1@144.798,62.357 149.443,62.357 149.5,62.3 ; D11_'.4@143.205,188.035 C3_S4.1@144.898,188.035 146,186.932 v1(146,184.8) ; D12_'.4@144.348,177.875 C4_S4.1@146.298,177.875 146.398,177.975 148.149,177.975 148.5,178.326 ; D13_'.4@144.602,167.715 144.645,167.757 146.555,167.757 C10_S2.1@146.597,167.8 148.149,167.8 148.5,168.151 148.5,178.326 ; D9_S3.4@145.669,72.921 C13_'.1@147.598,72.921 149.979,72.921 150,72.9 ; 146.281,184.419 148.462,182.238 148.462,182.138 148.5,182.1 148.5,178.326 ; D2_S2.4@147.014,158.42 C14_S2.1@147.014,156.502 147.014,155.186 148.7,153.5 152.2,153.5 153.543,152.157 ; D10_S2.4@147.193,108.077 D10_S2.4@147.216,108.077 C8_S2.1@147.216,106.203 147.2,106.186 147.2,104.9 149.4,102.7 152.9,102.7 153.543,102.057 ; D6_S2.4@147.395,133.147 C7_'.1@147.395,131.302 147.495,131.202 147.495,130.478 151.273,126.7 156.2,126.7 158,124.9 158,124.551 ; D8_S3.4@148.539,83.264 D8_S3.4@148.539,83.514 ; D8_S3.4@148.539,83.764 D8_S3.4@148.539,83.514 ; D9_'.4@148.641,190.933 C2_S4.1@147.002,190.933 146.948,190.987 146.948,191.752 146.538,192.162 146.036,192.162 v1(145.998,192.2) 146.016,192.218 146.016,193.719 v1(146.034,193.737) 144.8,194.971 144.8,198.7 146.077,199.977 146.602,199.977 C12_S2.1@146.702,200.077 D10_'.4@148.641,200.077 ; 150.6,79.2 153.276,79.2 C11_'.1@153.302,79.173 D6_S3.4@155.245,79.173 D6_S3.4@155.098,79.32 ; v1@150.602,91.298 v1(150.602,91.2) C10_'.1@150.602,89.841 D7_S3.4@152.451,89.841 ; 151,45.3 151.472,45.772 C2_'.1@162.402,45.772 D3_S3.4@164.262,45.772 D3_S3.4@164.262,46.022 ; 151.248,57.912 D4_S3.4@160.884,57.912 ; v1(151.4,70.1) 153.5,70.1 154.9,68.7 156.043,68.7 C2_S2.1@156.102,68.759 D5_S3.4@158.039,68.759 158.039,69.009 157.839,69.209 D5_S3.4@157.589,69.209 ; D7_S2.4@152.019,119.022 C7_S2.1@153.798,119.022 155.322,119.022 158,121.7 158,124.551 ; D3_S2.4@153.543,148.844 C6_'.1@153.543,150.798 153.543,152.157 ; D11_S2.4@153.649,98.7 D11_S2.4@153.543,98.806 C9_'.1@153.543,100.698 153.543,102.057 ; v1(154.38,80.879) 151.07,80.879 150.598,81.351 C15_'.1@150.598,83.514 D8_S3.4@148.539,83.514 ; v1@154.383,80.876 v1@154.437,80.876 ; D8_'.4@154.761,179.502 C5_S4.1@154.761,177.602 154.761,176.439 155.183,176.017 ; 156,102.1 155.957,102.057 153.543,102.057 ; D7_'.4@160.477,188.162 C1_S4.1@162.398,188.162 162.498,188.062 162.498,185.002 163.9,183.6 163.9,176.1 164,176 ; 160.5,176 160.58,175.92 C6_S4.1@160.58,174.497 D14_'.4@160.58,172.542 ; D9_S2.4@160.984,106.223 C3_S2.1@160.984,104.302 160.984,102.216 161,102.2 ; D5_S2.4@161.44,128.88 C5_S2.1@161.44,127.002 161.44,124.551 ; D15_'.4@165.862,158.648 D15_'.4@165.862,158.392 C8_'.1@167.798,158.392 168.992,158.392 ; D1_S2.4@166.573,149.3 C9_S2.1@168.498,149.3 171.4,149.3 ; C7_S4.1@167.102,172.9 167.102,172.899 D6_'.4@169.088,172.899 D6_'.4@169.094,172.905 ; C7_S4.1@167.102,172.9 167.102,176.048 167.3,176.246 v1(167.3,176.3) ; D8_S2.4@167.386,121.031 C4_S2.1@167.386,122.998 167.386,123 167.486,123 167.4,123.086 167.4,124.551 ; D4_S2.4@167.819,143.078 C6_S2.1@167.819,144.998 167.819,146.462 ; C5_'.1@168.862,99.598 C5_'.1@168.962,99.498 ; D12_S2.4@168.962,97.612 C5_'.1@168.962,99.498 ; D13_S2.4@169.494,80.974 D13_S2.4@169.367,81.101 C1_S3.1@171.298,81.101 175.899,81.101 ; 170,161 171.364,161 C8_S4.1@171.402,160.961 ; 171.3,124.5 171.249,124.551 167.4,124.551 ; 171.3,146.5 171.262,146.462 167.819,146.462 ; C8_S4.1@171.302,160.962 171.302,160.861 C8_S4.1@171.402,160.961 ; D14_S2.4@171.381,68.926 D14_S2.4@171.323,68.984 C1_S2.1@173.198,68.984 175.984,68.984 176,69 ; 171.601,149.999 172.652,148.948 C9_S4.1@175.502,148.948 D4_'.4@177.394,148.948 D4_'.4@177.394,148.488 ; 172.499,99.5 168.962,99.5 C5_'.1@168.962,99.498 ; D15_S2.4@173.05,57.225 C4_'.1@174.998,57.225 179.5,57.225 ; D5_'.4@173.152,160.706 D5_'.4@173.152,160.961 C8_S4.1@171.402,160.961 ; 173.6,117.1 177.4,117.1 177.446,117.146 C12_S4.1@179.002,117.146 ; D1_S3.4@174.879,45.997 C1_'.1@176.798,45.997 176.898,46.097 177.52,46.097 180.923,49.5 181,49.5 ; C10_S4.1@176.702,138.557 176.645,138.5 175.7,138.5 175.2,138 175.2,133.2 177.656,130.744 177.656,129.844 177.802,129.698 C11_S4.1@177.802,127.687 ; C10_S4.1@176.759,138.557 D3_'.4@178.664,138.557 D3_'.4@178.636,138.529 ; 177,96.9 177.657,96.9 C15_S2.1@179.959,99.202 ; D2_'.4@179.756,127.687 179.656,127.787 177.902,127.787 C11_S4.1@177.802,127.687 ; D1_'.4@180.899,117.146 C12_S4.1@179.002,117.146 ; 182.5,48.5 182.678,48.322 C16.1@182.678,45.798 D2_S3.4@182.678,43.891 D2_S3.4@182.687,43.9 ; 153.543,152.157 155.143,152.157 157.6,149.7 158.6,149.7 161.8,146.5 167.781,146.5 167.819,146.462 ; 158,124.551 161.44,124.551 ; 161.44,124.551 167.4,124.551 ; C11_S4.1@177.802,127.687 176.887,127.687 176.3,127.1 176.3,121.8 179.002,119.098 C12_S4.1@179.002,117.146
  Bottom Layer w0.6: v1(145.998,192.2) 145.999,192.199 v1(146,184.8) v1(146,184.8) ; v1(150.602,91.2) 150.639,91.163 150.639,85.761 154.4,82 154.4,80.899 v1(154.38,80.879) ; v1(171.2,162.6) v1@171.2,162.644 ; v1@171.962,163.406 v1@171.962,163.462
  other v1: 149.4,59.4 150.7,59.4 149.4,60.7 150.7,60.7 123.3,65.1 123.3,66.2 124.5,66.2 149.9,70.1 149.2,71.3 150.6,71.3 152.1,71.3 175.3,77 176.5,77.8 175.3,78.4 176.5,79.3 175.3,79.8 170.5,163.5 172,163.5 151.4,176 152.6,176 153.7,176 168.4,176.3 169.5,176.3
CKI: D1_'.2 P1.5 | length 5.5
  Top Layer w0.4: D1_'.2@182.499,110.946 182.499,109.701 184.24,107.96 P1.5@184.24,106.2